# EAGLE board pocketbeagle-breakout (EAGLE 9.5.0), part 1 of 2
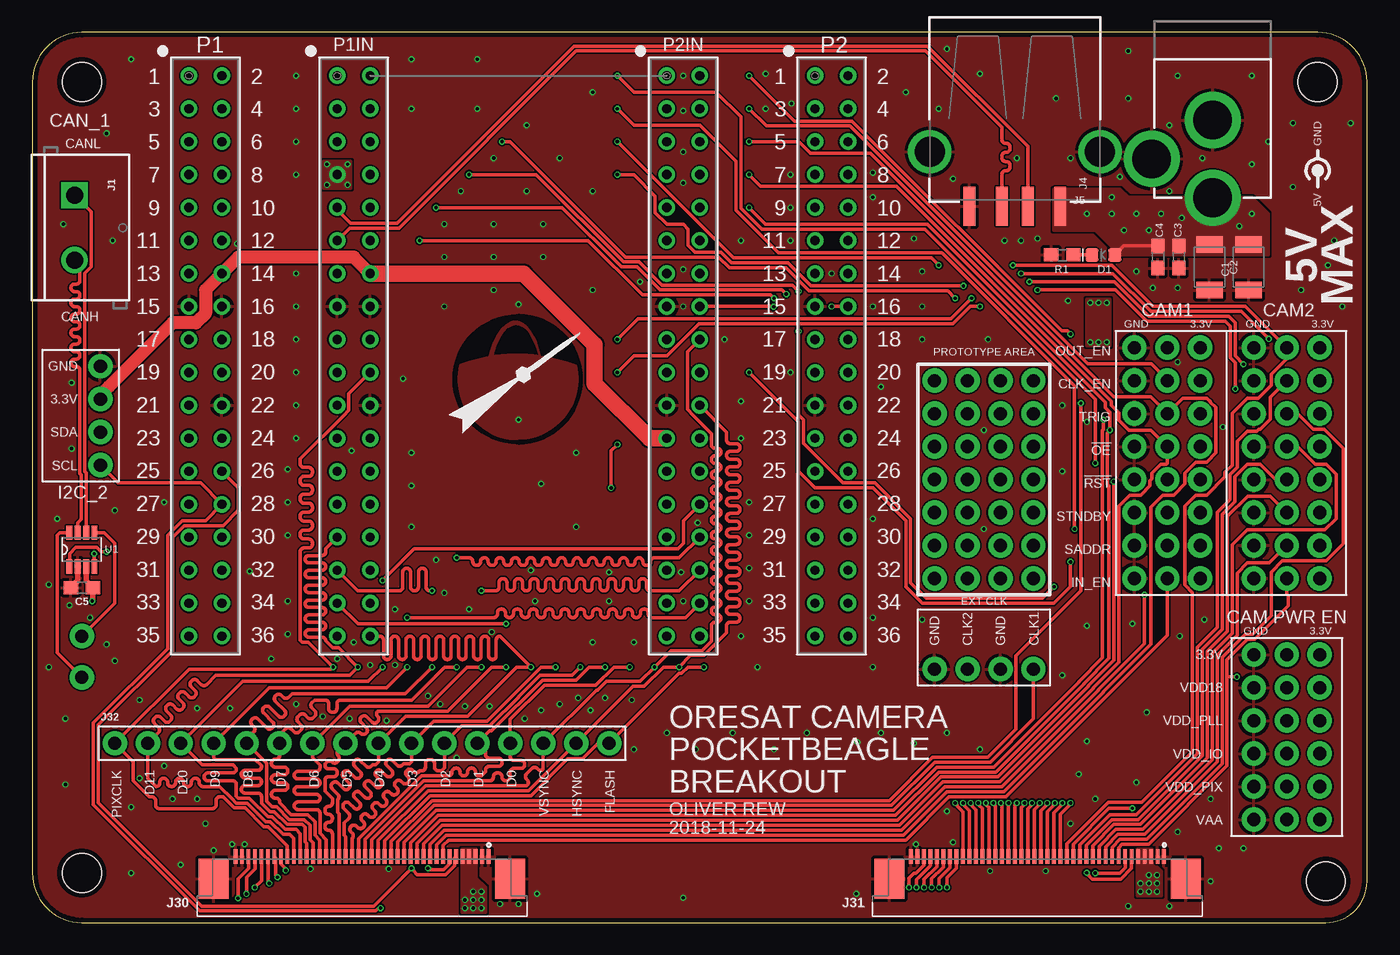
[diagram p0: board, top side]
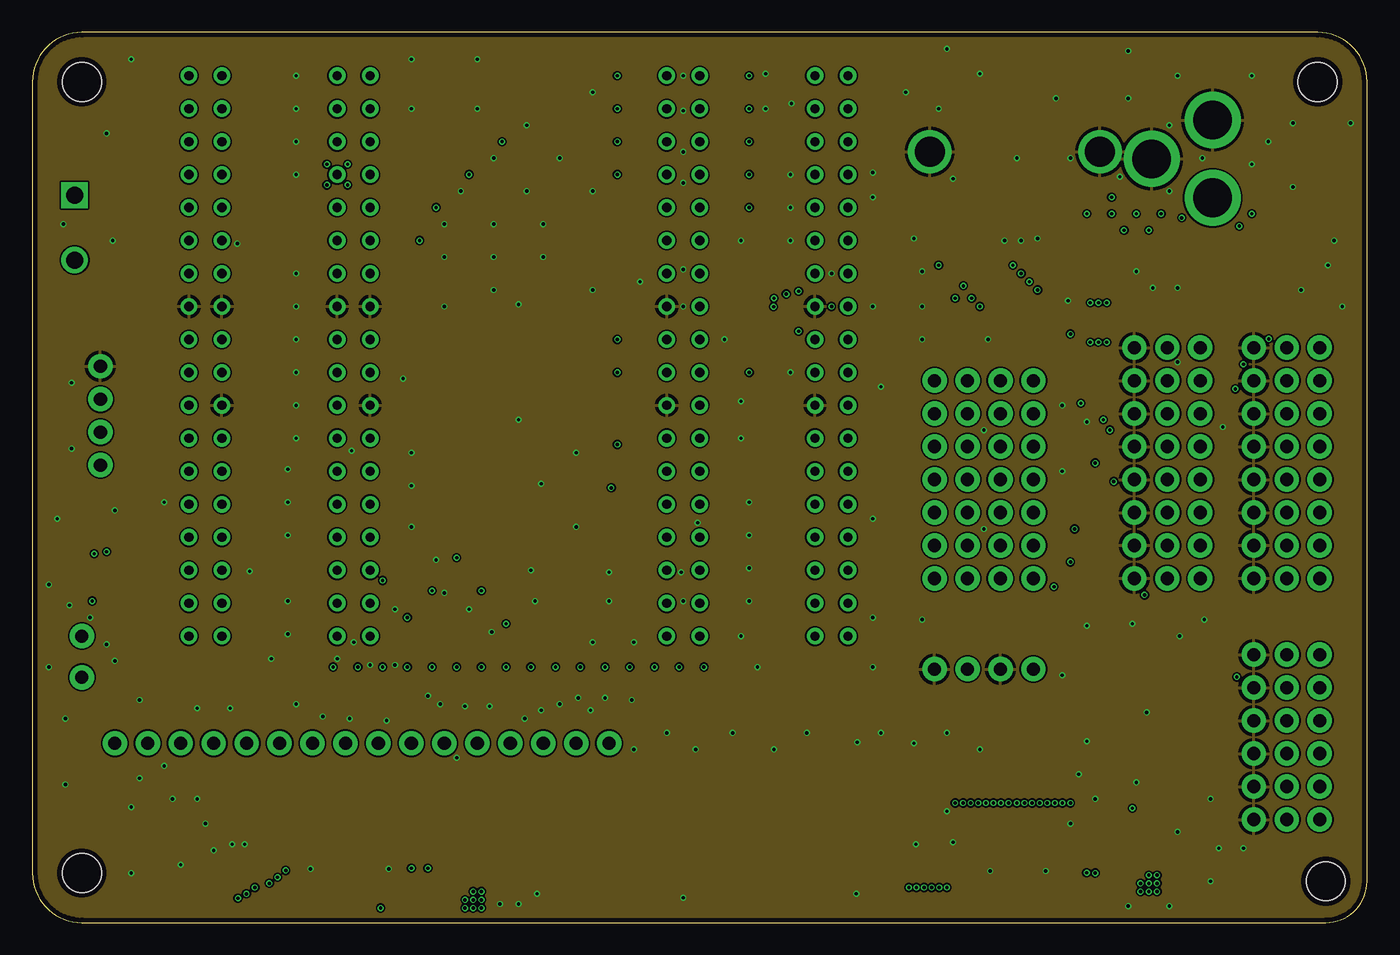
[diagram p1: board, inner layer Route2]
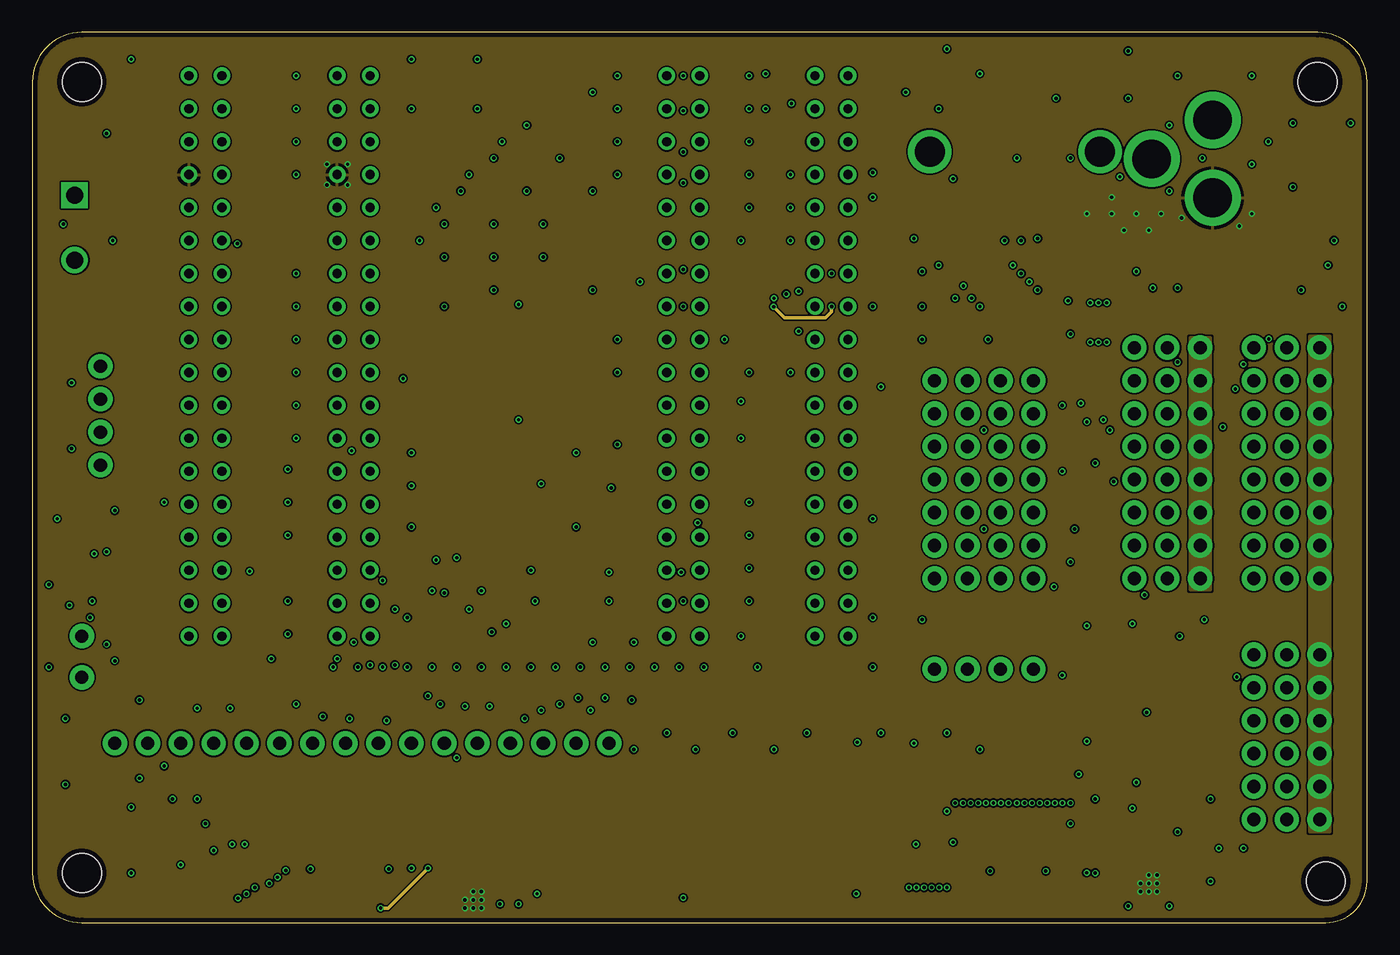
[diagram p2: board, inner layer Route15]
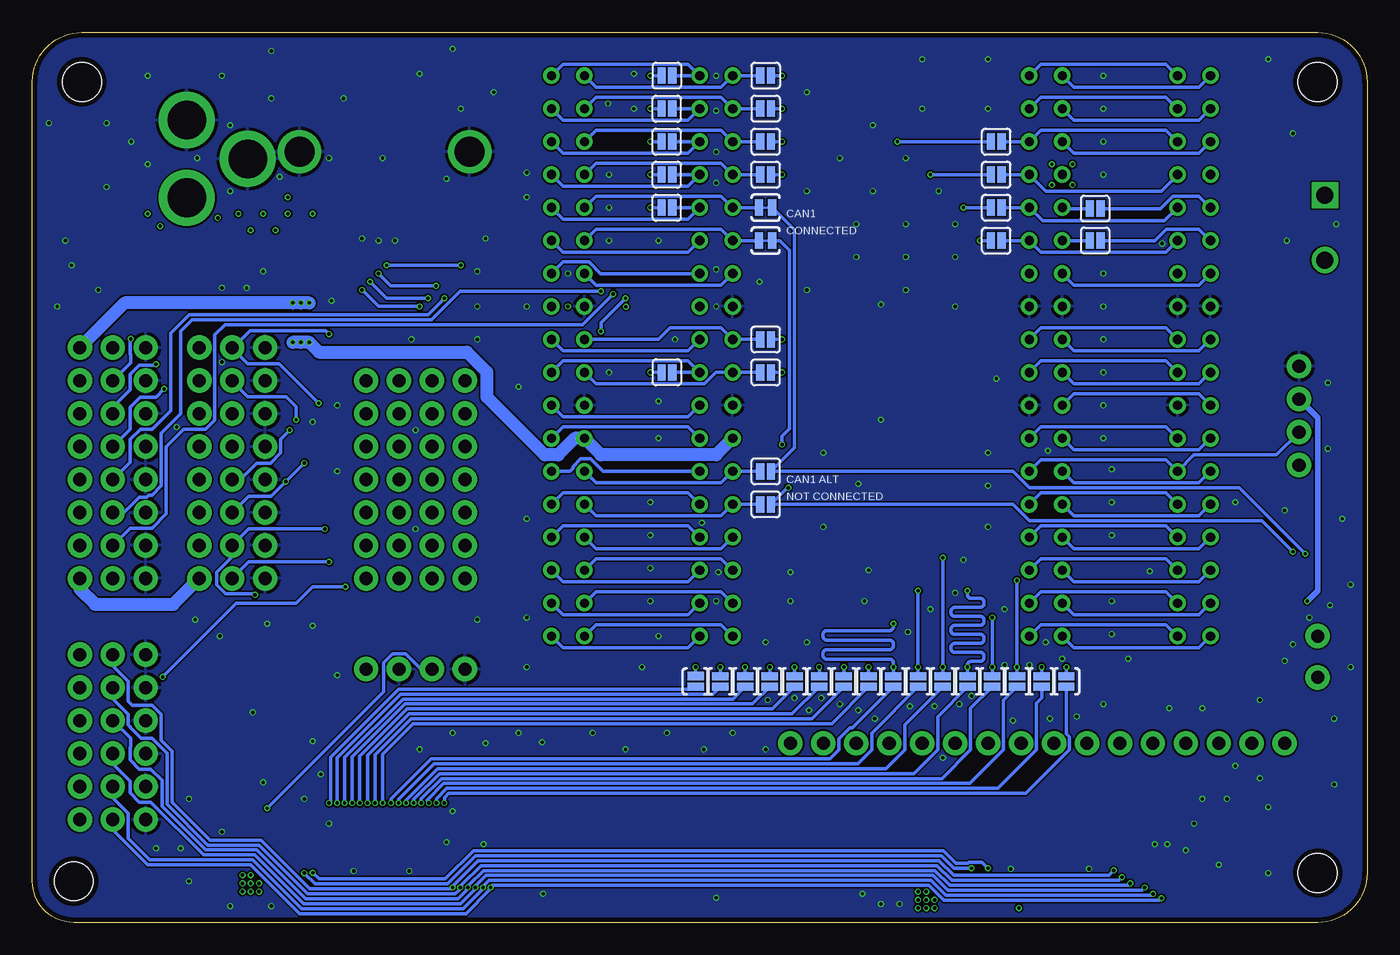
[diagram p3: board, bottom side, seen from below]

Size 102.87 x 68.58 mm. Coordinates in mm from the lower left corner, seen from the top.
Outline: 3.81,0 99.69,0 arc90 102.87,3.17 102.87,64.77 arc90 99.06,68.58 3.81,68.58 arc90 0,64.77 0,3.81 arc90 3.81,0
Copper layers (1*2*15*16): Top 0.035559375mm / dielectric 0.17018125mm / Route2 0.01778125mm / dielectric 47mil / Route15 0.01778125mm / dielectric 0.17018125mm / Bottom 0.035559375mm
Design rules "oshpark-4layer-tented": minimum track width 5mil, minimum drill 10mil, track to track 5mil, track to pad 5mil, pad to pad 5mil, via to via 5mil, smd to smd 5mil, copper to edge 15mil, drill to drill 6mil, minimum pad ring 4mil, minimum via ring 4mil, stop-mask expansion 2.5mil, vias tented up to drill 20mil, thermal gap 10mil
Holes 3 mm at 3.81,3.81 99.69,3.17 3.81,64.77 99.06,64.77

## Footprints (pad centres in the part's own frame; a part is rotated, then mirrored left to right if it is on the bottom)
1210 = smd 1.27 x 2.06: 1 -1.755,0; 2 1.755,0
0603 = smd 1.1 x 1: 1 -0.85,0; 2 0.85,0
LED-0603 = smd 1 x 1: A -0.877,0; C 0.877,0
SCREWTERMINAL-5MM-2 = drill 1.3 pad 2.032 square: 1 0,0 | drill 1.3 pad 2.032: 2 5,0
1X03_NO_SILK = drill 1.016 pad 1.88: 1 0,0; 2 2.54,0; 3 5.08,0
USB-A-S-SILK-FEMALE = smd 3 x 0.9: D+ 7.212,-1; D- 7.212,1; GND 7.212,-3.5; VBUS 7.212,3.5 | drill 2.311: SHLD1 3,-6.566; SHLD2 3,6.566
POWER_JACK_PTH = drill 2.997 pad 4.318: GND 0,7.7; GNDBREAK 4.7,10.7; PWR 0,13.7
1X04_NO_SILK = drill 1.016 pad 1.88: 1 0,0; 2 2.54,0; 3 5.08,0; 4 7.62,0
TE_4-1734592-0 = smd 0.3 x 1.1: 1 -9.75,0; 2 -9.25,0; 3 -8.75,0; 4 -8.25,0; 5 -7.75,0; 6 -7.25,0; 7 -6.75,0; 8 -6.25,0; 9 -5.75,0; 10 -5.25,0; 11 -4.75,0; 12 -4.25,0; 13 -3.75,0; 14 -3.25,0; 15 -2.75,0; 16 -2.25,0; 17 -1.75,0; 18 -1.25,0; 19 -0.75,0; 20 -0.25,0; 21 0.25,0; 22 0.75,0; 23 1.25,0; 24 1.75,0; 25 2.25,0; 26 2.75,0; 27 3.25,0; 28 3.75,0; 29 4.25,0; 30 4.75,0; 31 5.25,0; 32 5.75,0; 33 6.25,0; 34 6.75,0; 35 7.25,0; 36 7.75,0; 37 8.25,0; 38 8.75,0; 39 9.25,0; 40 9.75,0 | smd 2.3 x 3.1: S1 11.42,1.7; S2 -11.42,1.7
1X16_NO_SILK = drill 1.016 pad 1.88: 1 0,0; 2 2.54,0; 3 5.08,0; 4 7.62,0; 5 10.16,0; 6 12.7,0; 7 15.24,0; 8 17.78,0; 9 20.32,0; 10 22.86,0; 11 25.4,0; 12 27.94,0; 13 30.48,0; 14 33.02,0; 15 35.56,0; 16 38.1,0
1X01_NO_SILK = drill 1.016 pad 1.88: 1 0,0
CON36_2X18_TU_BCS = drill 0.711 pad 1.27: 1 21.59,1.27; 2 21.59,-1.27; 3 19.05,1.27; 4 19.05,-1.27; 5 16.51,1.27; 6 16.51,-1.27; 7 13.97,1.27; 8 13.97,-1.27; 9 11.43,1.27; 10 11.43,-1.27; 11 8.89,1.27; 12 8.89,-1.27; 13 6.35,1.27; 14 6.35,-1.27; 15 3.81,1.27; 16 3.81,-1.27; 17 1.27,1.27; 18 1.27,-1.27; 19 -1.27,1.27; 20 -1.27,-1.27; 21 -3.81,1.27; 22 -3.81,-1.27; 23 -6.35,1.27; 24 -6.35,-1.27; 25 -8.89,1.27; 26 -8.89,-1.27; 27 -11.43,1.27; 28 -11.43,-1.27; 29 -13.97,1.27; 30 -13.97,-1.27; 31 -16.51,1.27; 32 -16.51,-1.27; 33 -19.05,1.27; 34 -19.05,-1.27; 35 -21.59,1.27; 36 -21.59,-1.27
SJ_2S-NOTRACE = smd 0.635 x 1.27: 1 -0.401,0; 2 0.413,0
SJ_2S = smd 0.635 x 1.27: 1 -0.412,0; 2 0.412,0
SJ_2S-TRACE = smd 0.635 x 1.27: 1 -0.508,0; 2 0.508,0
SOT23-8_TI-DCN = smd 0.45 x 1.1: 1 -0.975,-1.3; 2 -0.325,-1.3; 3 0.325,-1.3; 4 0.975,-1.3; 5 0.975,1.3; 6 0.325,1.3; 7 -0.325,1.3; 8 -0.975,1.3

## Placement (x,y rotation side)
C1  22UF  [1210]  93.74,50.48 270 top
C2  22UF  [1210]  90.73,50.48 270 top
C3  0.1uF  [0603]  88.34,51.28 270 top
C4  0.1uF  [0603]  86.76,51.28 270 top
C5  0.1uF  [0603]  3.81,25.8 180 top
D1  GREEN  [LED-0603]  82.55,51.44 180 top
J1  [SCREWTERMINAL-5MM-2]  3.25,56.04 270 top
J3  [1X03_NO_SILK]  84.93,29.05 0 top
J4  USB_A_SMT_FEMALE  [USB-A-S-SILK-FEMALE]  75.72,62.39 270 top
J5  POWER_JACK  [POWER_JACK_PTH]  90.96,69.53 180 top
J6  [1X03_NO_SILK]  94.14,29.05 0 top
J7  [1X03_NO_SILK]  94.14,31.59 0 top
J8  [1X03_NO_SILK]  94.14,34.13 0 top
J9  [1X03_NO_SILK]  94.14,36.67 0 top
J10  [1X03_NO_SILK]  94.14,39.21 0 top
J11  [1X03_NO_SILK]  94.14,41.75 0 top
J12  [1X03_NO_SILK]  94.14,7.94 0 top
J13  [1X03_NO_SILK]  94.14,10.48 0 top
J14  [1X03_NO_SILK]  94.14,13.02 0 top
J15  [1X03_NO_SILK]  94.14,15.56 0 top
J16  [1X03_NO_SILK]  94.14,18.1 0 top
J17  [1X03_NO_SILK]  94.14,20.64 0 top
J18  [1X03_NO_SILK]  94.14,26.51 0 top
J19  [1X04_NO_SILK]  5.24,42.86 270 top
J20  [1X03_NO_SILK]  94.14,44.29 0 top
J22  [1X03_NO_SILK]  84.93,31.59 0 top
J23  [1X03_NO_SILK]  84.93,34.13 0 top
J24  [1X03_NO_SILK]  84.93,36.67 180 bottom
J25  [1X03_NO_SILK]  84.93,39.21 0 top
J26  [1X03_NO_SILK]  84.93,41.75 0 top
J27  [1X03_NO_SILK]  84.93,26.51 0 top
J28  [1X03_NO_SILK]  84.93,44.29 0 top
J30  4-1734592-04-1734592-0  [TE_4-1734592-0]  25.4,5.08 180 top
J31  4-1734592-04-1734592-0  [TE_4-1734592-0]  77.47,5.08 180 top
J32  [1X16_NO_SILK]  6.35,13.81 0 top
J36  [1X01_NO_SILK]  3.81,22.07 180 top
J37  [1X01_NO_SILK]  3.81,18.89 180 top
J38  [1X04_NO_SILK]  69.53,19.53 0 top
J39  [1X04_NO_SILK]  69.53,41.75 0 top
J40  [1X04_NO_SILK]  69.53,39.21 0 top
J41  [1X04_NO_SILK]  69.53,36.67 0 top
J42  [1X04_NO_SILK]  69.53,34.13 0 top
J43  [1X04_NO_SILK]  69.53,31.59 0 top
J44  [1X04_NO_SILK]  69.53,29.05 0 top
J45  [1X04_NO_SILK]  69.53,26.51 0 top
P1  BCS-118-L-D-TE  [CON36_2X18_TU_BCS]  13.34,43.66 90 top
P1IN  BCS-118-L-D-TE  [CON36_2X18_TU_BCS]  24.77,43.66 90 top
P2  BCS-118-L-D-TE  [CON36_2X18_TU_BCS]  61.59,43.66 90 top
P2IN  BCS-118-L-D-TE  [CON36_2X18_TU_BCS]  50.16,43.66 90 top
R1  1k  [0603]  79.38,51.44 180 top
SJ1  SOLDERJUMPERNC2  [SJ_2S-NOTRACE]  23.18,18.57 270 bottom
SJ2  SOLDERJUMPERNC2  [SJ_2S-NOTRACE]  47.94,18.57 270 bottom
SJ3  SOLDERJUMPERNC2  [SJ_2S-NOTRACE]  49.85,18.57 270 bottom
SJ4  SOLDERJUMPERNC2  [SJ_2S-NOTRACE]  25.08,18.57 270 bottom
SJ5  SOLDERJUMPERNC2  [SJ_2S-NOTRACE]  26.99,18.57 270 bottom
SJ6  SOLDERJUMPERNC2  [SJ_2S-NOTRACE]  28.89,18.57 270 bottom
SJ7  SOLDERJUMPERNC2  [SJ_2S-NOTRACE]  30.8,18.57 270 bottom
SJ8  SOLDERJUMPERNC2  [SJ_2S-NOTRACE]  32.7,18.57 270 bottom
SJ9  SOLDERJUMPERNC2  [SJ_2S-NOTRACE]  34.61,18.57 270 bottom
SJ10  SOLDERJUMPERNC2  [SJ_2S-NOTRACE]  36.51,18.57 270 bottom
SJ11  SOLDERJUMPERNC2  [SJ_2S-NOTRACE]  38.42,18.57 270 bottom
SJ12  SOLDERJUMPERNC2  [SJ_2S-NOTRACE]  40.32,18.57 270 bottom
SJ13  SOLDERJUMPERNC2  [SJ_2S-NOTRACE]  42.23,18.57 270 bottom
SJ14  SOLDERJUMPERNC2  [SJ_2S-NOTRACE]  44.13,18.57 270 bottom
SJ15  SOLDERJUMPERNC2  [SJ_2S-NOTRACE]  46.04,18.57 270 bottom
SJ16  SOLDERJUMPERNC2  [SJ_2S-NOTRACE]  51.75,18.57 90 bottom
SJ17  SOLDERJUMPERNC  [SJ_2S]  46.35,34.77 0 bottom
SJ18  SOLDERJUMPERNC  [SJ_2S]  46.35,32.23 0 bottom
SJ19  SOLDERJUMPERTRACE  [SJ_2S-TRACE]  46.35,55.09 0 bottom
SJ20  SOLDERJUMPERTRACE  [SJ_2S-TRACE]  46.35,52.55 0 bottom
SJ21  SOLDERJUMPERNC  [SJ_2S]  46.35,62.71 180 bottom
SJ22  SOLDERJUMPERNC  [SJ_2S]  46.35,65.25 180 bottom
SJ23  SOLDERJUMPERNC  [SJ_2S]  53.98,55.09 0 bottom
SJ24  SOLDERJUMPERNC  [SJ_2S]  53.98,57.63 0 bottom
SJ25  SOLDERJUMPERNC  [SJ_2S]  53.98,60.17 0 bottom
SJ26  SOLDERJUMPERNC  [SJ_2S]  46.35,44.93 0 bottom
SJ27  SOLDERJUMPERNC  [SJ_2S]  46.35,42.39 0 bottom
SJ28  SOLDERJUMPERNC  [SJ_2S]  46.35,60.17 0 bottom
SJ29  SOLDERJUMPERNC  [SJ_2S]  46.35,57.63 0 bottom
SJ30  SOLDERJUMPERNC  [SJ_2S]  28.57,60.17 0 bottom
SJ31  SOLDERJUMPERNC  [SJ_2S]  28.57,57.63 0 bottom
SJ32  SOLDERJUMPERNC  [SJ_2S]  28.57,55.09 0 bottom
SJ33  SOLDERJUMPERNC  [SJ_2S]  28.57,52.55 0 bottom
SJ34  SOLDERJUMPERNC  [SJ_2S]  53.98,65.25 180 bottom
SJ35  SOLDERJUMPERNC  [SJ_2S]  53.98,42.39 180 bottom
SJ36  SOLDERJUMPERNC  [SJ_2S]  53.98,62.71 0 bottom
SJ37  SOLDERJUMPERNC  [SJ_2S]  20.95,55.01 180 bottom
SJ38  SOLDERJUMPERNC  [SJ_2S]  20.95,52.55 180 bottom
U1  TCAN330  [SOT23-8_TI-DCN]  3.81,28.73 0 top
U$1  [PSAS_LOGO_10X10_NEW]  37.47,41.91 0 top
U$2  [POLARITY_SYMBOL_SMALL]  99.06,57.94 90 top

## Library data of the parts
C1 C2 = SparkFun-Capacitors
C3-C5 = SparkFun-Capacitors; PROD_ID: CAP-08390
D1 = SparkFun-LED; PROD_ID: DIO-00821
J1 = SparkFun-Connectors; SF_SKU: PRT-08432
J3 J6-J18 J20 J22-J28 J32 J36 J37 = SparkFun-Connectors
J4 = SparkFun-Connectors; PROD_ID: CONN-09520; SF_ID: PRT-09011
J5 = SparkFun-Connectors; PROD_ID: CONN-08197
J19 J38-J45 = SparkFun-Connectors; PROD_ID: CONN-09696
J30 J31 U$1 U$2 = Oliver_Custom
P1 P1IN P2 P2IN = J-SAMTEC-2x18-BCS-118-L-D-TE; MANUFACTURER_PART_NUMBER: BCS118LDTE; VENDOR: Samtec Inc
R1 = SparkFun-Resistors; PROD_ID: RES-07856
SJ1-SJ38 = SparkFun-Passives
U1 = U-TI-TCAN330-CAN-transceiver

## Nets
3.3V: C5.1 J3.3 J6.3 J7.3 J8.3 J9.3 J10.3 J11.3 J12.3 J13.3 J14.3 J15.3 J16.3 J17.3 J18.3 J19.2 J20.3 J22.3 J23.3 J24.3 J25.3 J26.3 J27.3 J28.3 P1.14 P1IN.14 P2.23 P2IN.23 U1.3
3.3V_EN: J17.2 J30.33 J31.33
5V: C1.1 C2.1 C3.1 C4.1 D1.A J4.VBUS J5.PWR J30.3 J30.4 J30.5 J31.3 J31.4 J31.5 P1.7 P1IN.7
CAN_H: J1.2 U1.7
CAN_L: J1.1 U1.6
CAN_RX: SJ17.2 SJ19.2 U1.4
CAN_TX: SJ18.2 SJ20.2 U1.1
CLK_EN_1: J26.2 J30.14 SJ36.1
CLK_EN_2: J11.2 J31.14 SJ29.2
D0: J30.20 J32.13 SJ15.1
D1: J30.21 J32.12 SJ14.1
D2: J30.22 J32.11 SJ13.1
D3: J30.23 J32.10 SJ12.1
D4: J30.24 J32.9 P1.36 P1IN.36 SJ11.1
D5: J30.25 J32.8 P1.33 P1IN.33 SJ10.1
D6: J30.26 J32.7 P2.32 P2IN.32 SJ9.1
D7: J30.27 J32.6 P2.30 P2IN.30 SJ8.1
D8: J30.28 J32.5 P1.31 P1IN.31 SJ7.1
D9: J30.29 J32.4 P2.34 P2IN.34 SJ6.1
D10: J30.30 J32.3 P2.28 P2IN.28 SJ5.1
D11: J30.31 J32.2 P1.29 P1IN.29 SJ4.1
EXTCLK_1: J30.15 J38.4
EXTCLK_2: J31.15 J38.2
FLASH: J30.17 J32.16 SJ16.2
GND: C1.2 C2.2 C3.2 C4.2 C5.2 J3.1 J4.GND J4.SHLD1 J4.SHLD2 J5.GND J5.GNDBREAK J6.1 J7.1 J8.1 J9.1 J10.1 J11.1 J12.1 J13.1 J14.1 J15.1 J16.1 J17.1 J18.1 J19.1 J20.1 J22.1 J23.1 J24.1 J25.1 J26.1 J27.1 J28.1 J30.1 J30.2 J30.39 J30.40 J30.S1 J30.S2 J31.1 J31.2 J31.39 J31.40 J31.S1 J31.S2 J38.1 J38.3 P1.15 P1.16 P1.22 P1IN.15 P1IN.16 P1IN.22 P2.15 P2.21 P2IN.15 P2IN.21 R1.2 U1.2
HSYNC: J30.18 J32.15 P2.22 P2IN.22 SJ3.1
INPUT_DRVR_EN_1: J27.2 J30.8 SJ35.2
INPUT_DRVR_EN_2: J18.2 J31.8 SJ33.1
N$1: P2.2 P2IN.2 SJ34.1
N$2: J31.17 SJ16.1
N$3: J31.18 SJ3.2
N$4: J31.19 SJ2.2
N$5: J31.20 SJ15.2
N$6: J31.21 SJ14.2
N$7: J31.22 SJ13.2
N$8: J31.23 SJ12.2
N$9: J31.24 SJ11.2
N$10: J31.25 SJ10.2
N$11: J31.26 SJ9.2
N$12: J31.27 SJ8.2
N$13: J31.28 SJ7.2
N$14: J31.29 SJ6.2
N$15: J31.30 SJ5.2
N$16: J31.31 SJ4.2
N$17: J31.32 SJ1.2
N$18: J36.1 U1.5
N$19: J37.1 U1.8
N$20: P2.9 P2IN.9 SJ19.1
N$21: P2.11 P2IN.11 SJ20.1
N$22: P2.25 P2IN.25 SJ17.1
N$23: P2.27 P2IN.27 SJ18.1
N$24: D1.C R1.1
N$25: P2.1 P2IN.1 SJ22.2
N$26: P2.10 P2IN.10 SJ23.2
N$27: P2.8 P2IN.8 SJ24.2
N$28: P2.6 P2IN.6 SJ25.2
N$29: P2.17 P2IN.17 SJ26.1
N$30: P2.19 P2IN.19 SJ27.1
N$31: P2.5 P2IN.5 SJ28.1
N$32: P2.7 P2IN.7 SJ29.1
N$33: P1.12 P1IN.12 SJ33.2
N$34: P1.10 P1IN.10 SJ32.2
N$35: P1.8 P1IN.8 SJ31.2
N$36: P1.6 P1IN.6 SJ30.2
N$37: P2.20 P2IN.20 SJ35.1
N$38: P2.4 P2IN.4 SJ36.2
N$39: P1.9 SJ37.1
N$40: P1.11 SJ38.1
N$41: P1.27 P1IN.27
N$42: P1.25 P1IN.25
N$43: P1.23 P1IN.23
N$44: P1.21 P1IN.21
N$45: P1.19 P1IN.19
N$46: P1.17 P1IN.17
N$47: P1.13 P1IN.13
N$48: P1.5 P1IN.5
N$49: P1.3 P1IN.3
N$50: P1.1 P1IN.1
N$51: P1.35 P1IN.35
N$52: P1.34 P1IN.34
N$53: P1.32 P1IN.32
N$54: P1.30 P1IN.30
N$55: P1.24 P1IN.24
N$56: P1.18 P1IN.18
N$57: P1.4 P1IN.4
N$58: P2.3 P2IN.3 SJ21.2
N$59: P1.2 P1IN.2
N$60: P2.13 P2IN.13
N$61: P2.29 P2IN.29
N$62: P2.31 P2IN.31
N$63: P2.33 P2IN.33
N$64: P2.35 P2IN.35
N$65: P2.12 P2IN.12
N$66: P2.14 P2IN.14
N$67: P2.16 P2IN.16
N$68: P2.24 P2IN.24
N$69: P2.26 P2IN.26
N$70: P2.36 P2IN.36
OE_BAR_1: J24.2 J30.11 SJ24.1
OE_BAR_2: J9.2 J31.11 SJ27.2
OUTPUT_DRVR_EN_1: J28.2 J30.16 SJ34.2
OUTPUT_DRVR_EN_2: J20.2 J31.16 SJ28.2
PIXCLK: J30.32 J32.1 P1.20 P1IN.20 SJ1.1
RST_BAR_1: J23.2 J30.13 SJ23.1
RST_BAR_2: J8.2 J31.13 SJ30.1
SADDR_1: J3.2 J30.10 SJ21.1
SADDR_2: J6.2 J31.10 SJ32.1
SCL2: J19.4 J30.7 J31.7 P1.28 P1IN.28
SDA2: J19.3 J30.6 J31.6 P1.26 P1IN.26
STANDBY_1: J22.2 J30.12 SJ22.1
STANDBY_2: J7.2 J31.12 SJ31.1
TRIG_1: J25.2 J30.9 SJ25.1
TRIG_2: J10.2 J31.9 SJ26.2
USB_D+: J4.D+ P1IN.11 SJ38.2
USB_D-: J4.D- P1IN.9 SJ37.2
VAA_EN: J12.2 J30.38 J31.38
VDD18_EN: J16.2 J30.34 J31.34
VDD_IO_EN: J14.2 J30.36 J31.36
VDD_PIX_EN: J13.2 J30.37 J31.37
VDD_PLL_EN: J15.2 J30.35 J31.35
VSYNC: J30.19 J32.14 P2.18 P2IN.18 SJ2.1